# Altium PCB PCB2.PcbDoc
Units mil, origin at the board's own origin, x right, y up, seen from the top; angles counter-clockwise.
Board outline 1080 x 640 mil, 2 copper layers (Top Layer, Bottom Layer); 10 components, 7 nets, 37 pads, 0 vias.
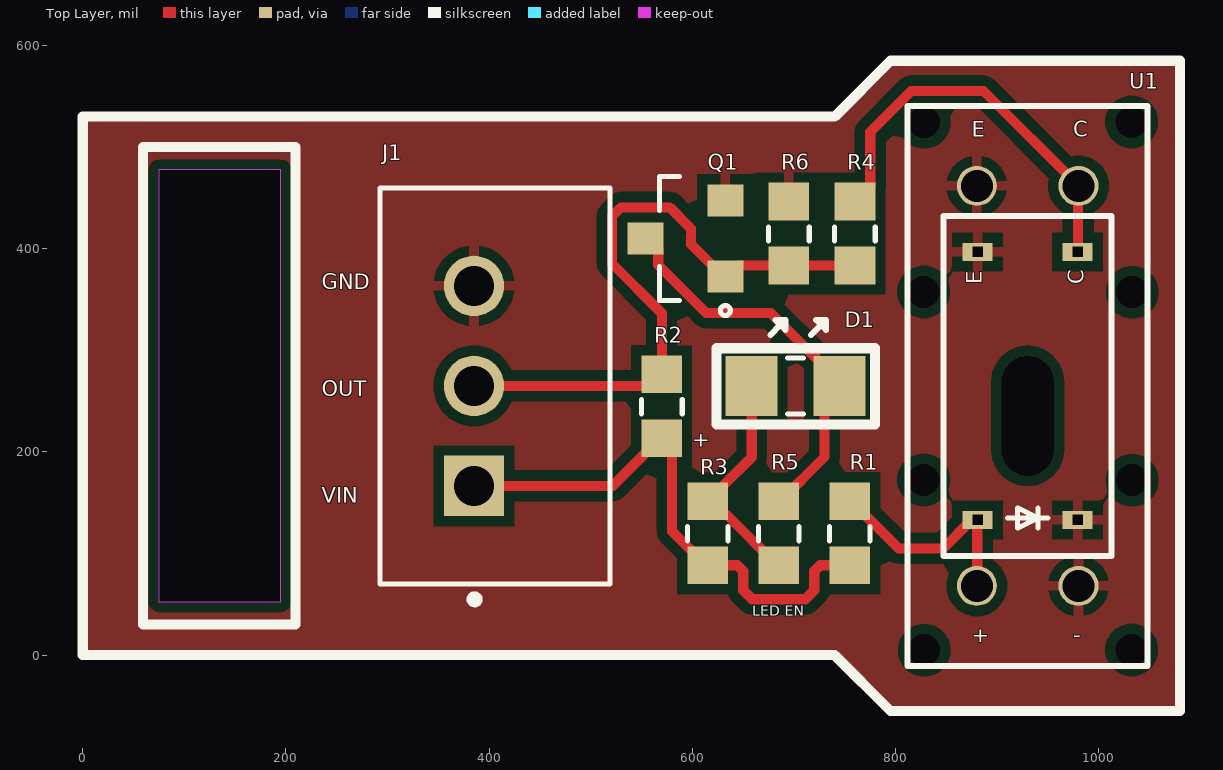
[diagram p0: Top Layer view]
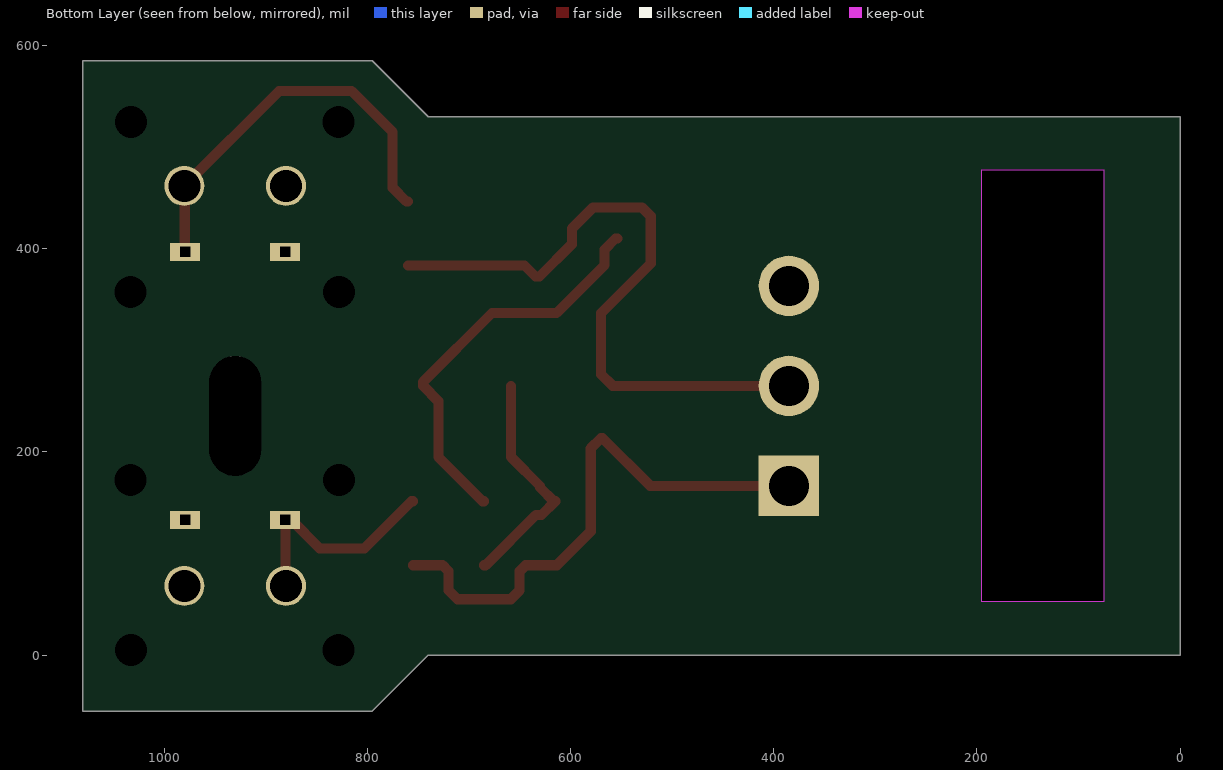
[diagram p1: Bottom Layer view, seen from below]
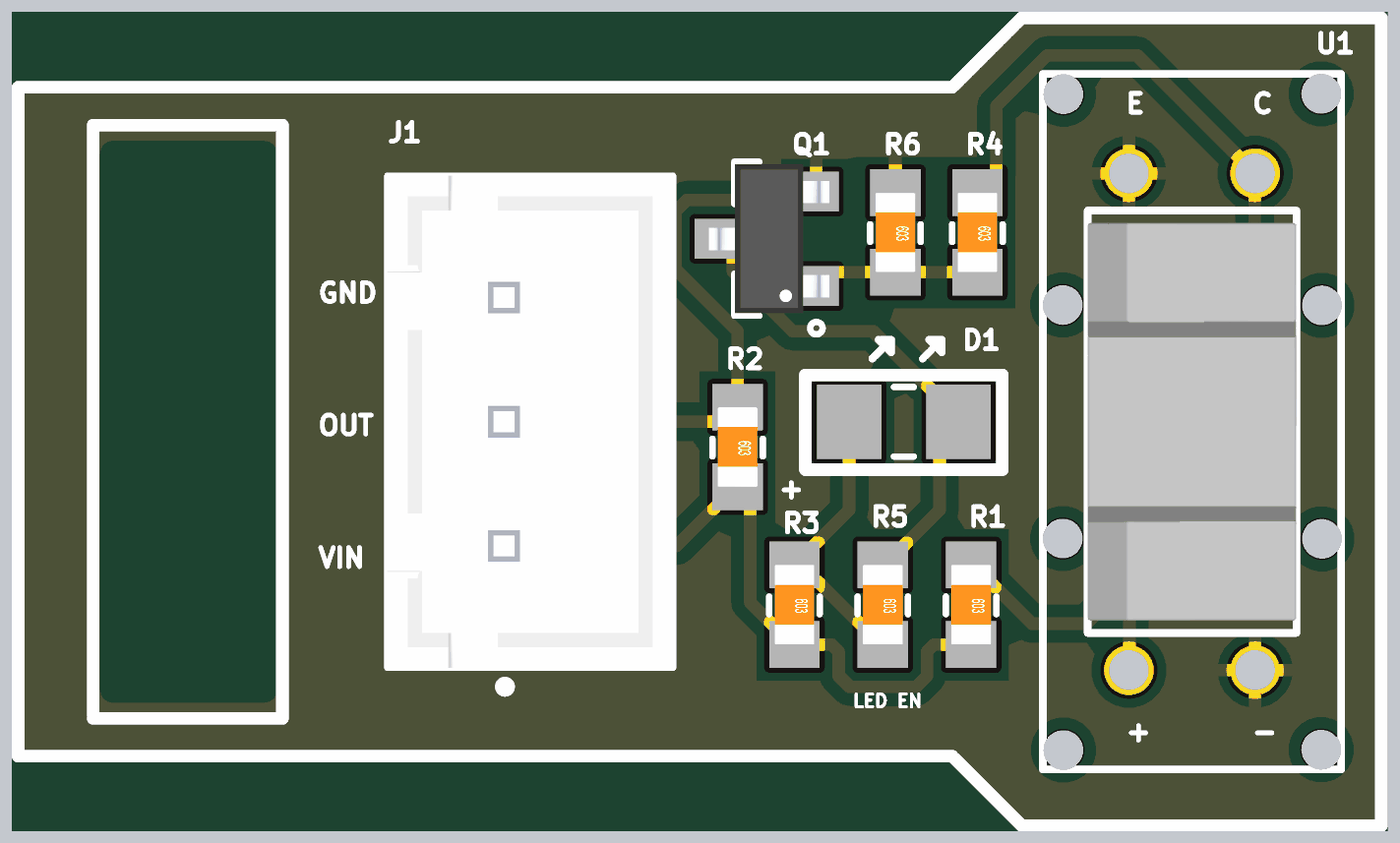
[diagram p2: 3D render of the assembled board from above, using the file's embedded part models]

## Layer stack, top to bottom
Top Solder: solder mask 0.4, Solder Resist, Dk 3.5
Top Layer: signal copper 1.4
Dielectric 1: dielectric 12.6, FR-4, Dk 4.8
Bottom Layer: signal copper 1.4
Bottom Solder: solder mask 0.4, Solder Resist, Dk 3.5

## Board outline
0,0 0,530 740,530 795,585 1080,585 1080,-55 795,-55 740,0
cut-out: 195,52.5 195,477.5 75,477.5 75,52.5

## Design rules (kind name [scope] priority, off if disabled: settings)
Clearance [All] p1: gap=10 ignorepadtopadclearanceinfootprint=FALSE
PolygonConnect [All] p1: connectstyle=Relief reliefconductorwidth=10 reliefentries=4 polygonreliefangle="90 Angle" airgapwidth=10
RoutingVias [All] p1: holewidth=28 width=50 viastyle="Through Hole" minholewidth=28 minwidth=50 maxholewidth=28 maxwidth=50
SolderMaskExpansion [All] p1: expansion=4 istentingtop=FALSE
SupplyNets "Schematic Supply Nets_1" [InNet('3V3')] p1: voltage=0.000
SupplyNets "Schematic Supply Nets" [InNet('GND')] p2: voltage=0.000
Width [All] p1: maxlimit=30 minlimit=10 preferedwidth=10
30 further rules are at their usual default settings.

## Components (designator, comment, footprint, x,y, rotation, side; value= is the part's Value field where it differs from the comment)
D1 "2.3V" 0805_LED 701.69,265 r0 top
J1 "CONN HEADER TH 3POS 2.5mm" JST_B3B-XH-A 405.67,265 r270 top (schematic designator J?)
Q1 "N CH" SOT_23_3 595,410 r180 top
R1 "150R 1/10W" 0603_res 755,120 r270 top value=150R
R2 "100R 1/10W" 0603_res 570,245 r270 top value=100R
R3 "RES 60Ω ±1% 100mW 0603" 0603_res 615,120 r270 top value=60
R4 "RES 30Ω ±5% 100mW 0603" 0603_res 760,415 r270 top value=30
R5 "0R 1/10W" 0603_res 685,120 r270 top value=0R
R6 "RES 30Ω ±5% 100mW 0603" 0603_res 695,415 r270 top value=30
U1 "SENSOR OPT SLOT PHOTOTRAN PCB MT" RPI-441C1E 930,265 r90 top

## Footprints (in the part's own frame and the unit in brackets; to place one, negate y for a bottom-side part, rotate by r counter-clockwise, add the part's x,y. Pads: shape width x height; smd on the part's side, far side on the other; paste and mask are expansions set on the pad)
0603_res [mil] "1608 Metric / 20190225 / C-A.Serna.A"
  rect 37x40 smd: 1(-31.5,0) 2(31.5,0)
  silkscreen extent -7,-20 8,20, body extent -31,-16 32,16, height 12
0805_LED [mm]
  rect 1.3x1.5 smd: 1(-1.1,0) 2(1.1,0)
  silkscreen extent -1.98,-0.97 1.98,1.65, body extent -1,-0.62 1,0.63, height 1.1
JST_B3B-XH-A [mm]
  rect 1.508x1.508 / inner round 1.508 / far side rect 1.508x1.508 hole 1: 1(2.5,-0.525)
  round 1.508 hole 1: 2(0,-0.525) 3(-2.5,-0.525)
  silkscreen extent -4.95,-2.88 5.43,2.87, body extent -4.95,-2.88 4.95,2.88, height 7
RPI-441C1E [mm]
  round 0.7 hole 0.8 unplated mask+0.076: 0(-6.607,2.587) 0(-6.6,-2.6) 0(-2.357,-2.613) 0(-2.35,2.6) 0(2.343,-2.613) 0(2.35,2.6) 0(6.593,2.587) 0(6.6,-2.6)
  oval 3x1 hole 1.3 slot 3 at 0 deg unplated mask+0.076: 0(-0.75,0)
  round 1 hole 0.8 unplated mask+0.076: 1(-5,-1.27) 2(-5,1.27) 3(5,-1.27) 4(5,1.27)
  rect 0.45x0.75 hole 0.25 square mask+0.076: 1(-3.35,-1.25) 2(-3.35,1.25) 3(3.35,-1.25) 4(3.35,1.25)
  silkscreen extent -7,-3 7,3, body extent -4,-2.1 4,2.1, height 5.2
SOT_23_3 [mm]
  rect 0.9x0.8 smd: 1(-0.95,0.95) 2(-0.95,-0.95) 3(1.05,0)
  silkscreen extent -1.07,-1.55 0.7,1.92, body extent -1.21,-1.5 1.21,1.5, height 1.12

## Part data
D1: library part LED_0805_Orange, "LED ORANGE WATER CLEAR 0805 SMD", Manufacturer=XINGLIGHT, Manufacturer Part Number=XL-2012UOC, Supplier Part Number 1=C965813, ComponentLink1Description=LCSC, ComponentLink1URL=https://www.lcsc.com/product-detail/C965813.html?s_z=n_XINGLIGHT%2520XL-2012, Supplier 1=LCSC
J1: library part "Connector JST 3pin", "3P 1x3P XH Tin -25℃~+85℃ White 2.5mm 250V 3 3A 1 Through Hole Through Hole,P=2.5mm Headers, Male Pins RoHS", Manufacturer=JST, Manufacturer Part Number=B3B-XH-A(LF)(SN), Supplier Part Number 1=C144394, ComponentLink1Description=LCSC, ComponentLink1URL=https://www.lcsc.com/product-detail/C144394.html?s_z=n_JST%2520b3, Supplier 1=LCSC
Q1: library part Q_NFET_50V_200mA_SOT23, "MOSFET N-CH 50V 200mA SOT-23", Manufacturer=onsemi, Manufacturer Part Number=BSS138LT1G, Supplier Part Number 1=C82045, ComponentLink1Description=LCSC, ComponentLink1URL=https://www.lcsc.com/product-detail/C82045.html, Supplier 1=LCSC
R1: library part Res_150R_0603_1/10W, "100mW Thick Film Resistor 75V ±100ppm/℃ ±1% 150Ω 0603 Chip Resistor - Surface Mount ROHS", Manufacturer=RALEC, Manufacturer Part Number=RTT031500FTP, Supplier Part Number 1=C103302, ComponentLink1Description=LCSC, ComponentLink1URL=https://lcsc.com/product-detail/Chip-Resistor-Surface-Mount_RALEC-RTT031500FTP_C103302.html, Supplier 1=LCSC
R2: library part Res_100R_0603_1/10W, "RES SMD 100R OHM 5% 1/10W 0603", Manufacturer=FOJAN, Manufacturer Part Number="FRC0603J101 TS", Supplier Part Number 1=C2907089, ComponentLink1Description=LCSC, ComponentLink1URL=https://www.lcsc.com/product-detail/Chip-Resistor-Surface-Mount_FOJAN-FRC0603J101-TS_C2907089.html, Supplier 1=LCSC
R3: library part Res_60_0603_1/10W, "100mW 60Ω 75V ±100ppm/℃ Thick Film Resistor ±1% 0603 Chip Resistor - Surface Mount RoHS", Manufacturer=RALEC, Manufacturer Part Number=RTT0360R0FTP, Supplier Part Number 1=C166918, ComponentLink1Description=LCSC, ComponentLink1URL=https://www.lcsc.com/product-detail/Chip-Resistor-Surface-Mount_FOJAN-FRC0603J102-TS_C2907113.html, Supplier 1=LCSC
R4 R6: library part Res_30_0603_1/10W, "100mW 30Ω 75V ±100ppm/℃ Thick Film Resistor ±5% 0603 Chip Resistor - Surface Mount RoHS", Manufacturer=FOJAN, Manufacturer Part Number="FRC0603J300 TS", Supplier Part Number 1=C2907150, ComponentLink1Description=LCSC, ComponentLink1URL=https://www.lcsc.com/product-detail/Chip-Resistor-Surface-Mount_FOJAN-FRC0603J102-TS_C2907113.html, Supplier 1=LCSC
R5: library part Res_0R_0603_1/10W, "RES SMD 0R OHM 5% 1/10W 0603", Manufacturer=FOJAN, Manufacturer Part Number="FRC0603P000 TS", Supplier Part Number 1=C2907080, ComponentLink1Description=LCSC, ComponentLink1URL=https://www.lcsc.com/product-detail/Chip-Resistor-Surface-Mount_FOJAN-FRC0603P000-TS_C2907080.html, Supplier 1=LCSC
U1: library part RPI-441C1E, "850nm 1.4V DIP-4 Photointerrupters - Slot Type - Transistor Output RoHS", Manufacturer=ROHM, Supplier Part Number 1=C919442, ComponentLink1Description=LCSC, ComponentLink1URL=https://www.lcsc.com/product-detail/C919442.html?s_z=n_RPI-441C1, Manufacturer Part Number=RPI-441C1E, Supplier 1=LCSC

## Nets (pads, with @x,y where several pads share a name; then routed paths per layer and width w, separated by ;. In a path a pad name is that pad's centre, name@x,y a point inside that pad or via, vN(x,y) a via of type N, cw(c..) or ccw(c..) an arc to the next point about the centre after c; other vN are vias at no path point)
3V3: J1.1 R1.2 R2.2 R3.2 | length 538.8
  Top Layer w10: J1.1 521.57,166.57 568.5,213.5 R2.2 580,203.5 580,122 613.5,88.5 R3.2 644.14,88.5 650,82.64 650,63.79 658.79,55 711.21,55 720,63.79 720,82.64 725.86,88.5 R1.2
GND: J1.3 Q1.2 R6.1 U1.1 U1.4
NetD1_1: D1.1 R3.1 R5.2 | length 226.9
  Top Layer w10: R3.1 628.5,138 634,138 683.5,88.5 R5.2 ; R3.1@616.5,151.5 630,165 630,166.5 658.39,194.89 D1.1
NetD1_2: D1.2 Q1.3 R5.1 | length 401.9
  Top Layer w10: Q1.3 555.63,410 566.38,399.25 566.38,383.94 613.59,336.74 677.2,336.74 745,268.94 D1.2 730,250 730,195 686.5,151.5 R5.1
NetR1_1: R1.1 U1.2 | length 222
  Top Layer w10: R1.1 756.5,151.5 803,105 846.77,105 874.88,133.11 880.79,133.11 880.39,132.72 880.39,68.54 U1.2@880,68.14
NetR4_1: R4.1 U1.3 | length 401.2
  Top Layer w10: R4.1 761.5,446.5 775,460 775,514.9 815.41,555.31 886.55,555.31 980.01,461.85 979.61,461.45 979.61,397.29 U1.3@979.21,396.89
SIGNAL: J1.2 Q1.1 R2.1 R4.2 R6.2 | length 648
  Top Layer w10: J1.2 558.5,265 R2.1 570,336.45 520.95,385.51 520.95,431.96 529.73,440.75 577.59,440.75 598.64,419.7 598.64,404.39 630.43,372.6 Q1.1 ; Q1.1@634.37,372.6 645.27,383.5 R6.2 R4.2
pads on no net: U1.0

## Polygon pours and split planes (outlines as drawn)
GND on Top Layer "GND_L01_P001" (solid, pour order 1): 0,0 0,530 740,530 795,585 1080,585 1080,-55 795,-55 740,0

## Silkscreen, mask and mechanical layers (free items; w line width, h text height)
Top Overlay:
  lines w10: 0,0 0,530 315,530 740,530 795,585 1080,585 1080,-55 795,-55 740,0 320,0 0,0 ; 59.42,30 209.42,30 209.42,500 59.42,500 59.42,30
  text "E" at 875,510 h15
  text "C" at 975,510 h15
  text "GND" at 235,360 h15
  text "OUT" at 235,255 h15
  text "VIN" at 235,150 h15
  text "LED EN" at 659,39 h10
  text "+" at 875,12.5 h15
  text "-" at 975,12.5 h15
Board Shape:
  lines w10: 0,0 0,530 ; 0,0 320,0 740,0 795,-55 1080,-55 1080,585 795,585 740,530 315,530 0,530 ; 0,0 0,530

## Text inside footprints (layer, text, board x,y; h text height)
D1: Top Overlay "+" at 600,205 h15
U1: Top Overlay "C" at 985,365 h15 r90; Top Overlay "E" at 885,365 h15 r90